# Altium PCB 5V_to_3V3_LDO.PcbDoc
Units mm, origin at the board's own origin, x right, y up, seen from the top; angles counter-clockwise.
Board outline 25 x 20 mm, 2 copper layers (Top Layer, Bottom Layer); 5 components, 3 nets, 12 pads, 3 vias.
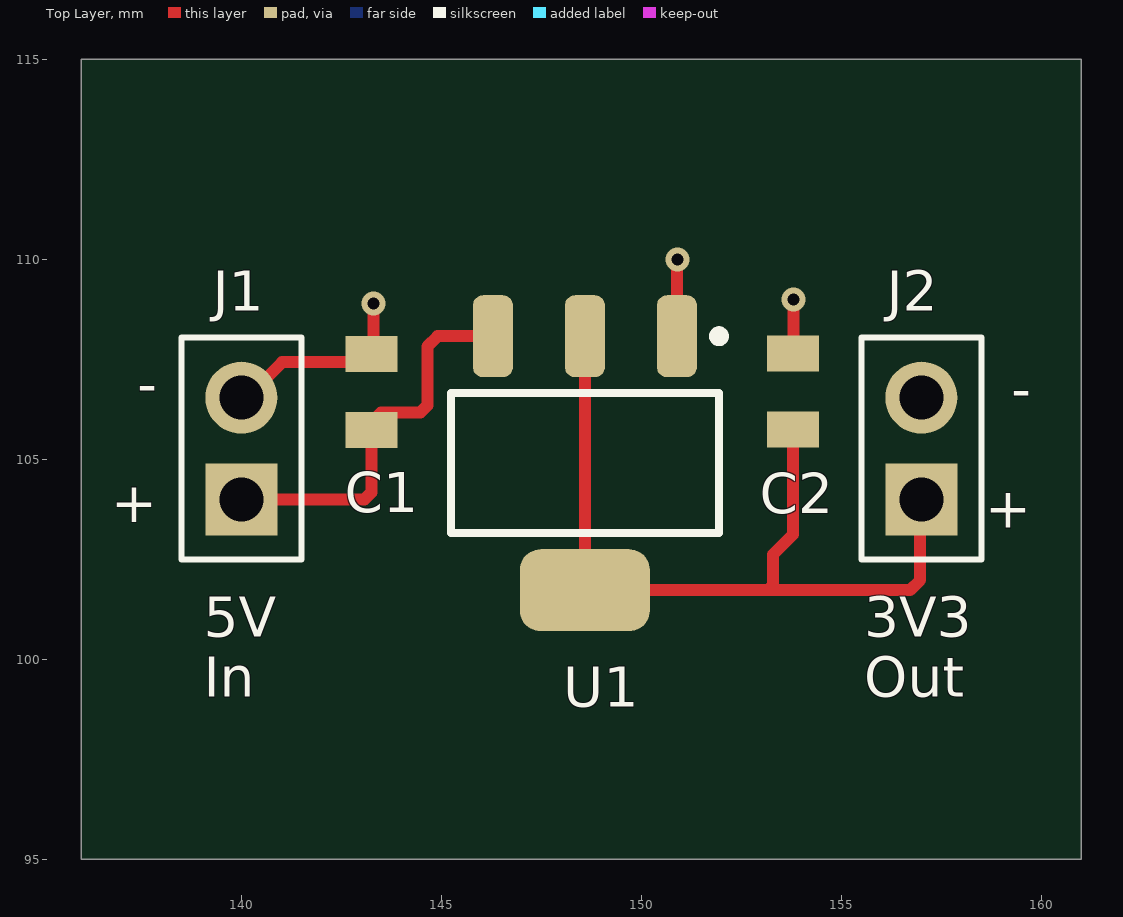
[diagram p0: Top Layer view]
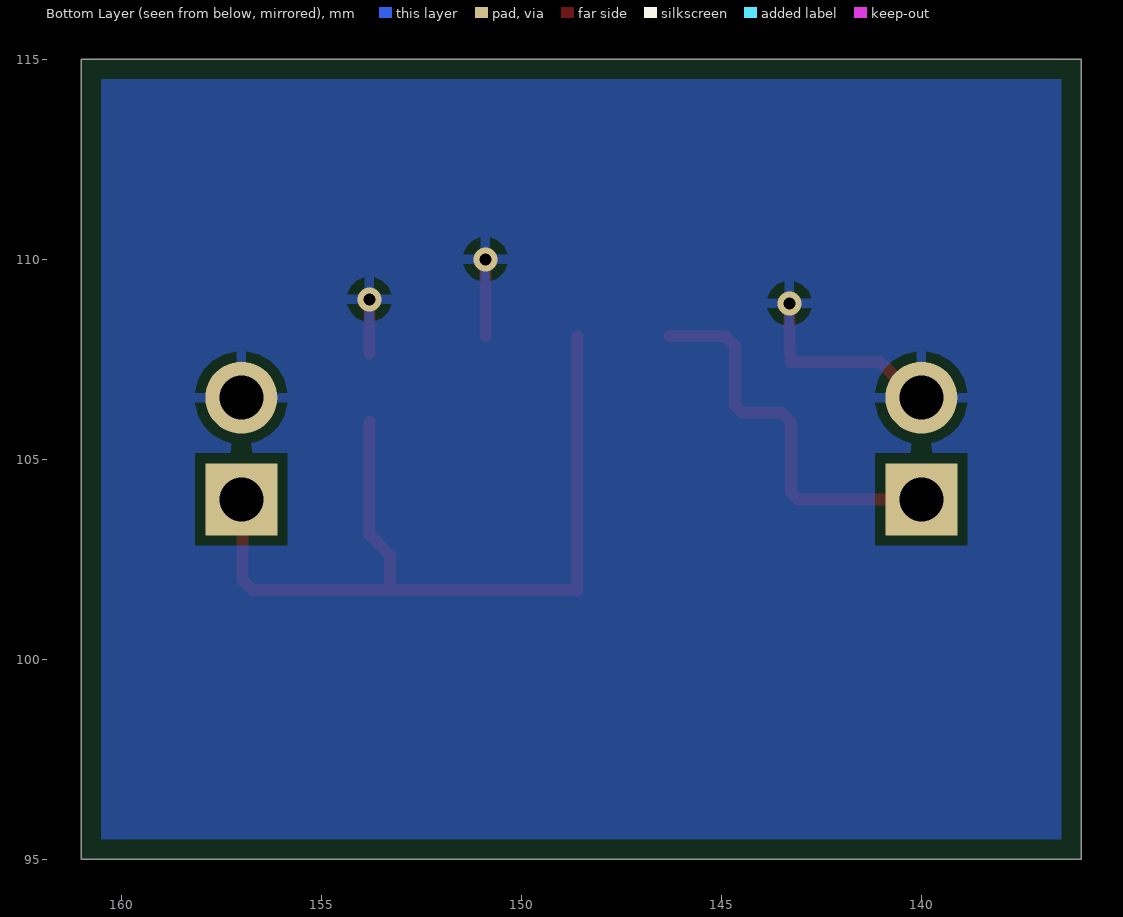
[diagram p1: Bottom Layer view, seen from below]

## Layer stack, top to bottom
Top Solder: solder mask 0.0102, Solder Resist, Dk 3.5
Top Layer: signal copper 0.0356
Dielectric 1: dielectric 0.32, FR-4, Dk 4.8
Bottom Layer: signal copper 0.0356
Bottom Solder: solder mask 0.0102, Solder Resist, Dk 3.5

## Board outline
136,95 161,95 161,115 136,115

## Design rules (kind name [scope] priority, off if disabled: settings)
BoardOutlineClearance [All] p1: gap=0.254 ignorepadtopadclearanceinfootprint=FALSE except(0: Arc-SplitContinuation Track-SplitContinuation SMDPad-SplitContinuation THPad-SplitContinuation Via-SplitContinuation Fill-SplitContinuation Poly-SplitContinuation Region-SplitContinuation Text-SplitContinuation; 0.5: Arc-OutlineEdge Track-OutlineEdge SMDPad-OutlineEdge THPad-OutlineEdge Via-OutlineEdge Fill-OutlineEdge Poly-OutlineEdge Region-OutlineEdge Text-OutlineEdge)
Clearance [All] p1: gap=0.254 ignorepadtopadclearanceinfootprint=FALSE
MinimumSolderMaskSliver [All] p1: minsoldermaskwidth=0.1
PolygonConnect [All] p1: connectstyle=Relief reliefconductorwidth=0.254 reliefentries=4 polygonreliefangle="90 Angle" airgapwidth=0.254
RoutingVias [All] p1: holewidth=0.711 width=1.27 viastyle="Through Hole" minholewidth=0.711 minwidth=1.27 maxholewidth=0.711 maxwidth=1.27
SolderMaskExpansion [All] p1: expansion=0.102 istentingtop=FALSE
SupplyNets "Schematic Supply Nets_2" [InNet('GND')] p1: voltage=0.000
SupplyNets "Schematic Supply Nets_1" [InNet('+3V3')] p2: voltage=0.000
SupplyNets "Schematic Supply Nets" [InNet('+5V')] p3: voltage=0.000
Width [All] p1: maxlimit=1 minlimit=0.254 preferedwidth=0.3
29 further rules are at their usual default settings.

## Components (designator, comment, footprint, x,y, rotation, side; value= is the part's Value field where it differs from the comment)
C1 "1uF" C0805 143.256,106.68 r270 top
C2 "1uF" C0805 153.797,106.692 r270 top
J1 "1x2 Header 2.54mm" PINHDR_1x02_P2.54_VERT 140,104 r180 top
J2 "1x2 Header 2.54mm" PINHDR_1x02_P2.54_VERT 157,104 r180 top
U1 "TLV1117LV33" TLV1117LV33DCYT 148.59,104.902 r270 top

## Footprints (in the part's own frame and the unit in brackets; to place one, negate y for a bottom-side part, rotate by r counter-clockwise, add the part's x,y. Pads: shape width x height; smd on the part's side, far side on the other; paste and mask are expansions set on the pad)
C0805 [mm] "Chip Capacitor, Body 2.0x1.3mm, IPC High Density"
  rect 0.9x1.3 smd: 1(-0.95,0) 2(0.95,0)
  body extent -1.1,-0.72 1.1,0.72, height 1.45
PINHDR_1x02_P2.54_VERT [mm]
  rect 1.8x1.8 hole 1.1: 1(0,0)
  round 1.8 hole 1.1: 2(0,-2.54)
  silkscreen extent -1.5,-4.04 1.5,1.5, body extent -1.27,-3.81 1.27,1.27, height 8.54
TLV1117LV33DCYT [mm] "4-pin SOT-223, package code DCY"
  rrect50% 2.05x1 smd: 1(-3.175,2.3) 2(-3.175,0) 3(-3.175,-2.3)
  rrect50% 2.05x3.25 smd: 4(3.175,0)
  silkscreen extent -3.3,-3.35 1.75,3.48, body extent -3.52,-3.25 3.52,3.25, height 1.8

## Part data
C1 C2: library part CAP_C0805, "Ceramic Capacitor, 0805 (2012 Metric)", Dielectric=X7R, Voltage Rating=10V, LatestRevisionDate=17-Jul-2002, LatestRevisionNote="Re-released for DXP Platform.", PackageDescription="Radial Cap, Thru-Hole; 2 Leads; 0.3 in Pin Spacing", PackageReference=RAD-0.3, Published=8-Jun-2000, Publisher="Altium Limited"
J1 J2: library part 61300211121, "2-pin vertical male header, 2.54mm pitch, through-hole", Manufacturer="Wurth Elektronik", ComponentLink2Description=Datasheet, ComponentLink2URL=https://www.we-online.com/components/products/datasheet/61300211121.pdf, Gender=Male, Manufacturer Part Number=61300211121, Mounting Technology="Through Hole", Number of Contacts=2, Number of Rows=1, Orientation=Vertical, Pins=2, Pitch=2.54mm, RoHS=Compliant
U1: "1-A, 3.3-V Fixed-Output LDO Regulator"

## Via types
v1: diameter 0.6, hole 0.3, Top Layer to Bottom Layer, 3 vias

## Nets (pads, with @x,y where several pads share a name; then routed paths per layer and width w, separated by ;. In a path a pad name is that pad's centre, name@x,y a point inside that pad or via, vN(x,y) a via of type N, cw(c..) or ccw(c..) an arc to the next point about the centre after c; other vN are vias at no path point)
+3V3: C2.2 J2.1 U1.2 U1.4 | length 21.3
  Top Layer w0.3: U1.2 U1.4 153.162,101.727 ; C2.2@153.797,105.942 153.797,103.124 153.289,102.616 153.289,101.854 153.162,101.727 ; J2.1 156.972,103.972 156.972,101.981 156.718,101.727 153.162,101.727
+5V: C1.2 J1.1 U1.3 | length 9.9
  Top Layer w0.3: J1.1 143.08,104 143.256,104.176 143.256,105.93 143.498,106.172 144.477,106.172 144.653,106.348 144.653,107.823 144.907,108.077 U1.3
GND: C1.1 C2.1 J1.2 J2.2 U1.1 | length 8.2
  Top Layer w0.3: J1.2 140.129,106.54 141.019,107.43 C1.1@143.256,107.43 ; C1.1 143.3,107.674 v1(143.3,108.9) ; U1.1 150.895,108.082 150.895,109.995 v1(150.9,110) ; C2.1 153.8,107.645 v1(153.8,109) ; J2.2@156.987,106.553 J2.2

## Polygon pours and split planes (outlines as drawn)
GND on Bottom Layer "GND_BOTTOM" (solid, remove dead copper, pour order 0): 136.5,114.5 160.5,114.5 160.5,95.5 136.5,95.5

## Silkscreen, mask and mechanical layers (free items; w line width, h text height)
Top Overlay:
  text "-" at 137.899,107.157 h1 r180
  text "-" at 159.743,107.03 h1 r180
  text "+" at 137.899,104.284 h1 r180
  text "+" at 159.743,104.157 h1 r180
  text "5V / In" at 139.065,99.06 h1
  text "3V3 / Out" at 155.575,99.06 h1
Mechanical 1:
  the board outline again, w0.1